# Allegro board AVRUSB500_0729.brd
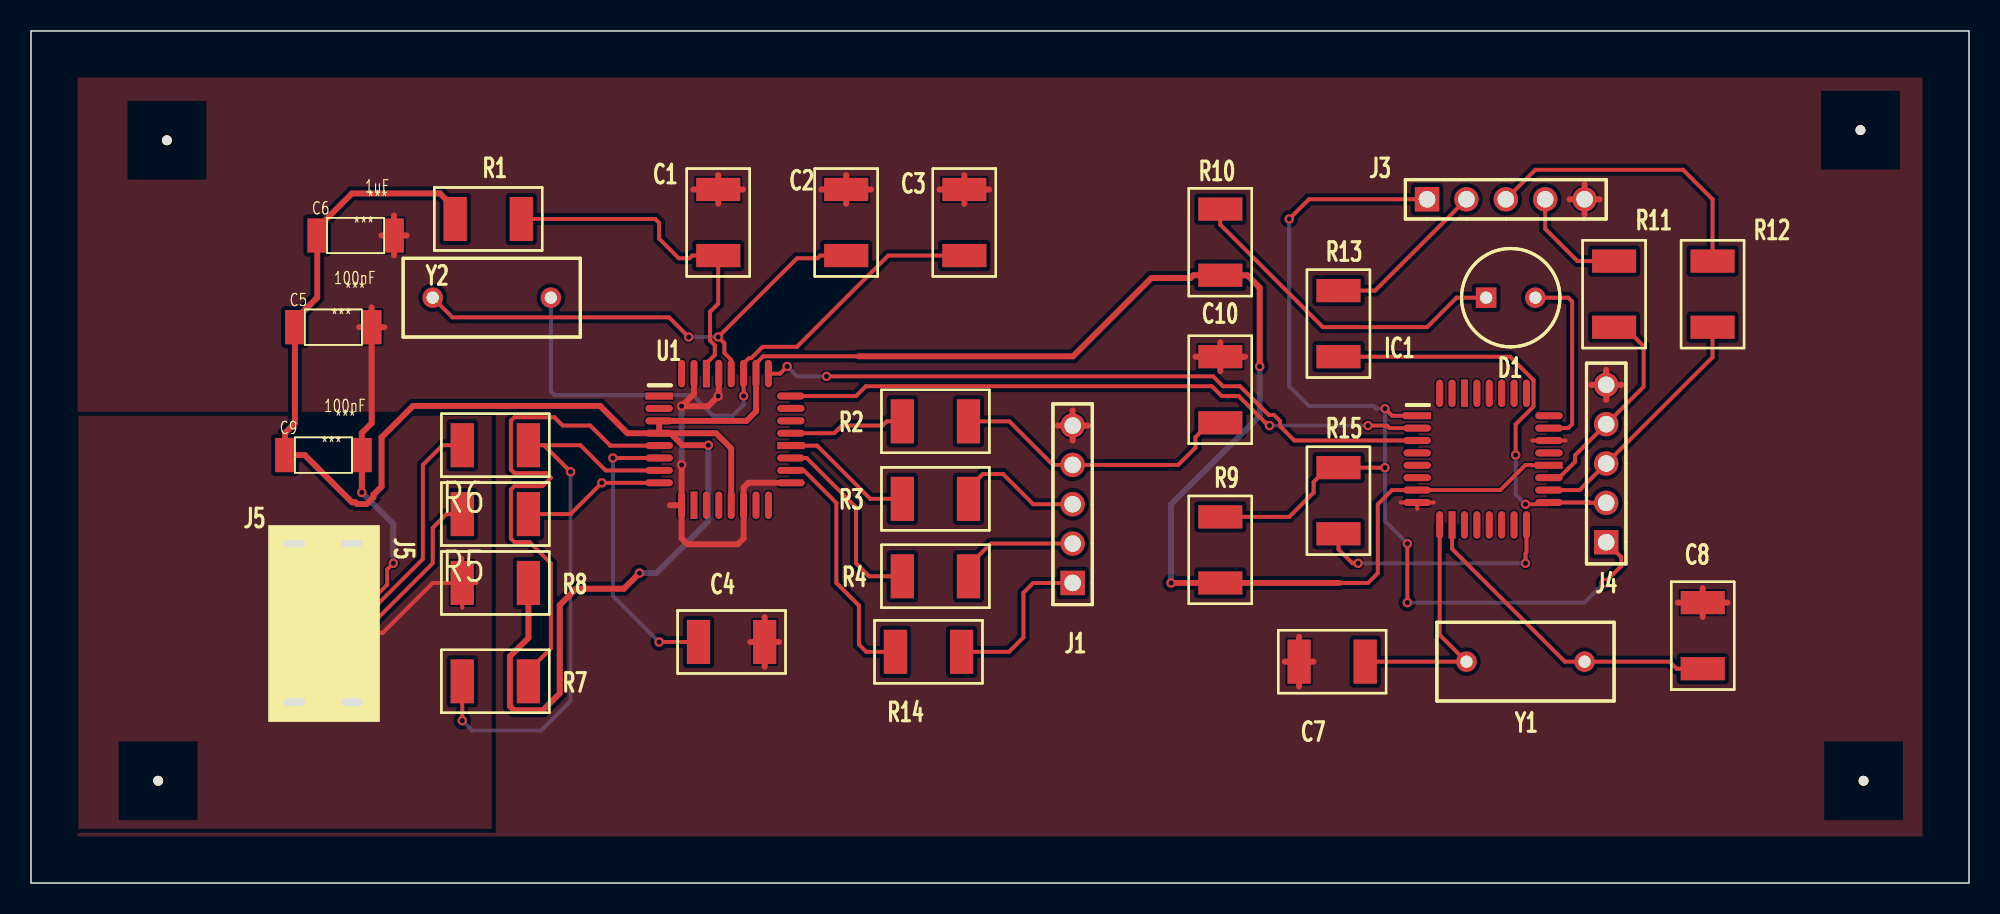
[diagram p0: board, top side]
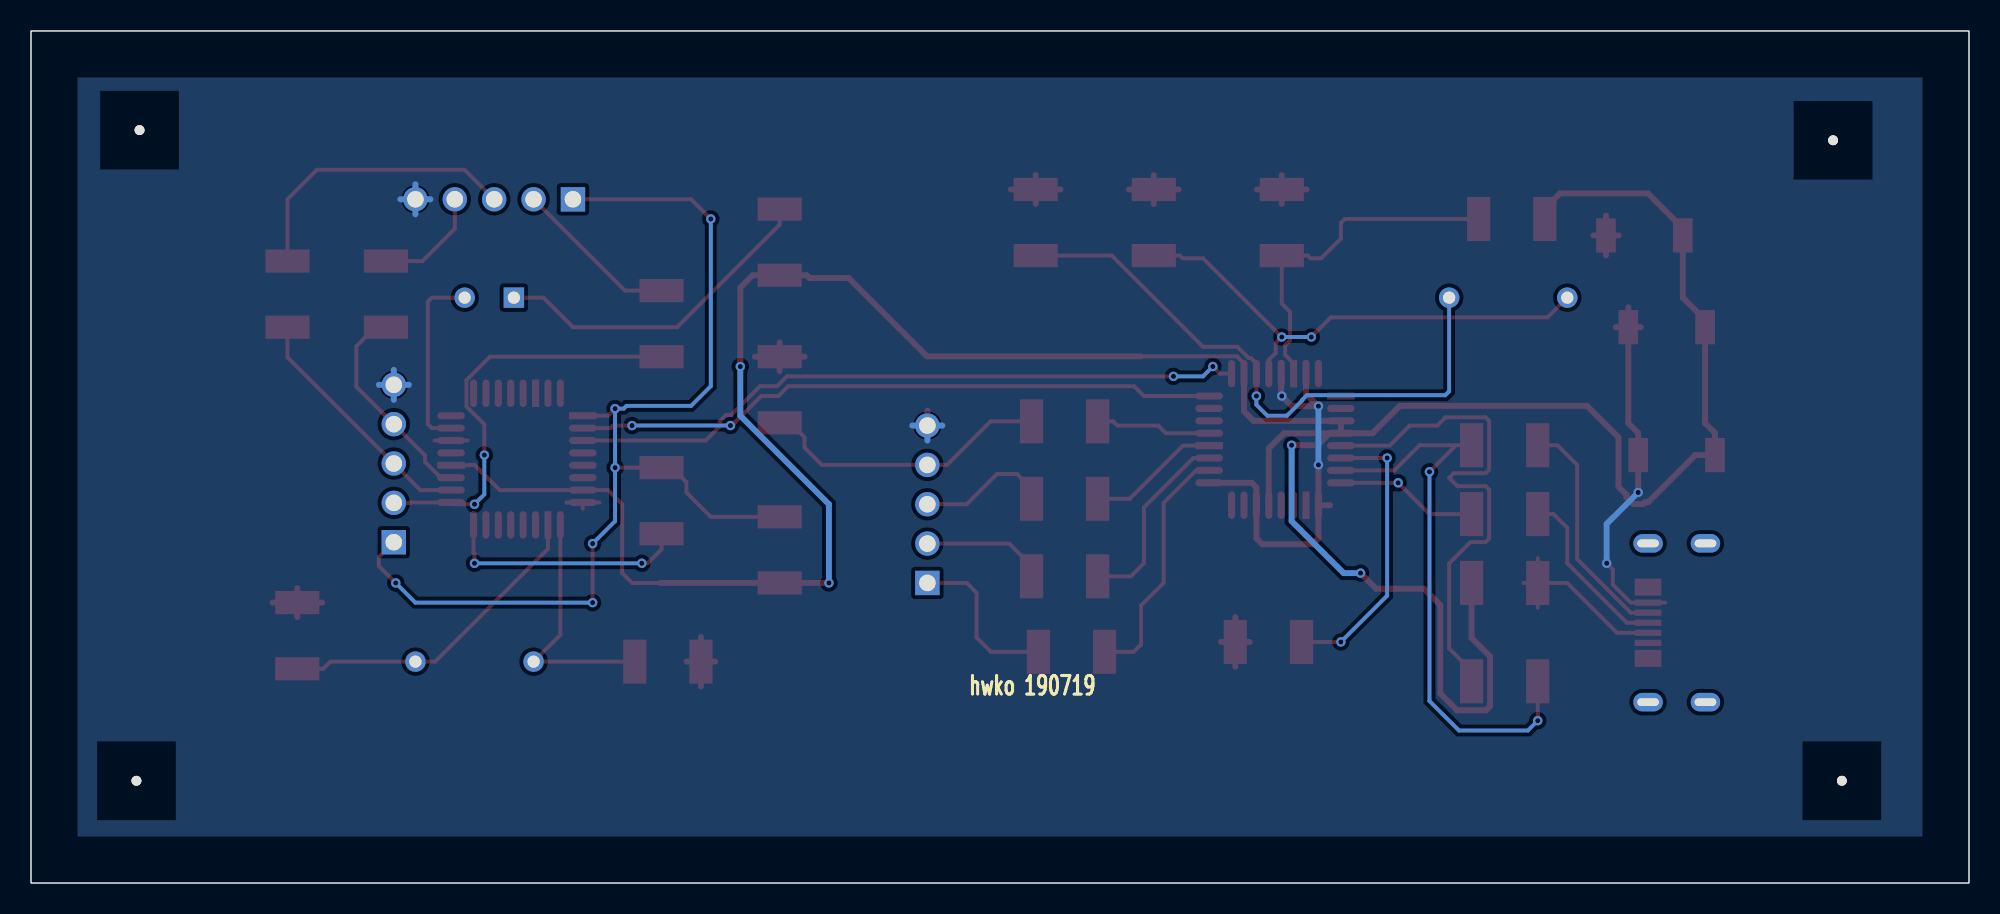
[diagram p1: board, bottom side, seen from below]

Outline 125 x 55 mm; copper layers: TOP, BOTTOM. Coordinates in mm from the lower left corner of the outline.
Outline path: rectangle 0,0 125,55

## Design rules (mm)
constraint set DEFAULT: min track width 0.254
net group POWERNETS: nets VCC

## Placement (name value [footprint] x y rotation side)
C1  47nF  [CPCYL1D225LS100031#2]  44.32 44.77 270 top
C2  27pF  [CPCYL1D225LS100031#2]  52.58 44.77 270 top
C3  27pF  [CPCYL1D225LS100031#2]  60.2 44.77 270 top
C4  47nF  [CPCYL1D225LS100031#2]  43.05 15.56 0 top
C5  100nF  [CPCYL1D225LS100031]  19.56 35.88 0 top
C6  1uF  [CPCYL1D225LS100031]  21 41.8 0 top
C7  100nF  [CPCYL1D225LS100031#2]  81.79 14.29 0 top
C8  100nF  [CPCYL1D225LS100031#2]  107.83 18.1 270 top
C9  100nF  [CPCYL1D225LS100031]  18.93 27.62 0 top
C10  22nF  [CPCYL1D225LS100031#2]  76.71 33.98 270 top
D1  LED  [CYLD250LS125031]  93.86 37.78 0 top
IC1  ATmega8  [QUAD80M32WG900]  89.41 30.16 270 top
J1  bbpg_Bitbang  [BLKCON100VHTM1SQSW1005]  67.19 19.37 90 top
J3  avrusb500_out  [BLKCON100VHTM1SQSW1005]  90.05 44.13 0 top
J4  firmware_in  [BLKCON100VHTM1SQSW1005]  101.6 22 90 top
J5  USBA  [MICRO_USB]  17 16.8 270 top
NOREF  -  []  125 0 90 top
NOREF#2  -  []  0 55 0 top
NOREF#3  -  [unnamed#2]  8.2 6.6 0 top
NOREF#4  -  [unnamed#2]  118 48.6 0 top
NOREF#5  -  [unnamed#2]  118.2 6.6 0 top
NOREF#6  -  [unnamed#2]  8.77 47.95 0 top
R1  470  [AX400X100031]  31.62 42.87 180 top
R2  220  [AX400X100031]  56.2 29.8 0 top
R3  220  [AX400X100031]  56.2 24.8 0 top
R4  220  [AX400X100031]  56.2 19.8 0 top
R5  27  [AX400X100031]  27.81 23.81 0 top
R6  27  [AX400X100031]  27.81 28.26 0 top
R7  1.5k  [AX400X100031]  27.81 13.02 0 top
R8  2.2  [AX400X100031]  27.81 19.37 0 top
R9  10k  [AX400X100031]  76.71 19.37 90 top
R10  470  [AX400X100031]  76.71 43.5 270 top
R11  1k  [AX400X100031]  102.11 35.88 90 top
R12  220  [AX400X100031]  108.46 35.88 90 top
R13  1k  [AX400X100031]  84.33 33.98 90 top
R14  220  [AX400X100031]  55.75 14.93 0 top
R15  220  [AX400X100031]  84.33 22.55 90 top
U1  FT232BM  [QUAD80M32WG900]  40.52 31.44 270 top
Y1  3.6864Mhz  [RAD450X200LS300031]  100.21 14.29 180 top
Y2  6Mhz  [RAD450X200LS300031]  25.91 37.78 0 top

## Library data of the parts
C1-C4 C7 C8 C10 = CAPACITOR NON-POL: alternate symbols: (SML2015)
C5 C9 = CAPACITOR NON-POL: Tolerance: ***; User Part Number: ***; alternate symbols: (SMDCAP)
C6 = CAPACITOR POL: Tolerance: ***; User Part Number: ***; alternate symbols: (SMDCAP)
D1 = LED
IC1 = ATmega8-DIL28_1
J1 J3 J4 = CON5
J5 = CON4_7
R1-R15 = R: alternate symbols: (SML2015)
U1 = FT232BM_2
Y1 Y2 = ZTA

## Footprints (pads in the part's own frame, mm; a bottom-side part is the same pattern mirrored in y, then rotated)
AX400X100031
  rect 1.499x2.845 smd: 1(0,0) 2(4.267,0)
BLKCON100VHTM1SQSW1005
  rect 1.575x1.575 hole 1.067: 1(0,0)
  round 1.575 hole 1.067: 2(2.54,0) 3(5.08,0) 4(7.62,0) 5(10.16,0)
CPCYL1D225LS100031
  rect 1.27x2.21 smd: 1(-2.54,0) 2(2.413,0)
CPCYL1D225LS100031#2
  rect 1.499x2.845 smd: 1(0,0) 2(4.267,0)
CYLD250LS125031
  rect 1.321x1.321 hole 0.787: 1(0,0)
  round 1.321 hole 0.787: 2(3.175,0)
MICRO_USB
  oval 1.2x1.9 hole 0.5x1.4: (-5.125,3.7) (-5.125,0) (5.125,3.7) (5.125,0)
  rect 1.1x1.72 smd: (-2.3,3.7) (2.3,3.7)
  rect 0.4x1.72 smd: 1(-1.3,3.7) 2(-0.65,3.7) 3(0,3.7) 4(0.65,3.7) 5(1.3,3.7)
QUAD80M32WG900
  rect 0.457x1.778 smd: 1(0,0) 20(3.2,8.496)
  oval 0.457x1.778 smd: 2(0.8,0) 3(1.6,0) 4(2.4,0) 5(3.2,0) 6(4,0) 7(4.801,0) 8(5.601,0) 17(5.601,8.496) 18(4.801,8.496) 19(4,8.496) 21(2.4,8.496) 22(1.6,8.496) 23(0.8,8.496) 24(0,8.496)
  oval 1.778x0.457 smd: 9(7.048,1.448) 11(7.048,3.048) 12(7.048,3.848) 13(7.048,4.648) 14(7.048,5.448) 15(7.048,6.248) 16(7.048,7.048) 25(-1.448,7.048) 26(-1.448,6.248) 27(-1.448,5.448) 28(-1.448,4.648) 29(-1.448,3.848) 31(-1.448,2.248) 32(-1.448,1.448)
  rect 1.778x0.457 smd: 10(7.048,2.248) 30(-1.448,3.048)
RAD450X200LS300031
  round 1.321 hole 0.787: 1(0,0) 2(7.62,0)
unnamed#2
  round 0.635 hole 3.175 unplated: (0,0)

## Nets
+5V: J5.4 R8.1
GND: C1.1 C2.1 C3.1 C4.2 C5.2 C6.2 C7.1 C8.1 C9.2 C10.1 IC1.8 IC1.22 J1.5 J3.5 J4.5 J5.1 U1.9 U1.14 U1.17 U1.29 U1.31
VCC: C5.1 C6.1 C9.1 IC1.7(VCC) IC1.20 R1.2 R8.2 R9.1 R10.2 U1.3 U1.4 U1.13 U1.26
BMISO: J1.3 R3.2
BMOSI: J1.2 R4.2
BRESET: J1.1 R14.2
BSCK: C10.2 J1.4 R2.2
D+: J5.2 R6.1
D-: J5.3 R5.1
F_MISO: IC1.18 J4.3 R12.1
F_MOSI: IC1.17 J4.2 R13.1
F_SCK: IC1.19 J4.4 R11.1
MISO: J3.3 R12.2
MOSI: J3.2 R13.2
RESET: IC1.1 J3.1 J4.1 R9.2 R15.2
RXD: IC1.2 U1.24
SCK: J3.4 R11.2
TXD: IC1.3 U1.25
N02483: R6.2 R7.1 U1.7
N02615: R5.2 U1.8
N03527: C4.1 U1.6
N06839: R2.1 U1.21
N06967: R3.1 U1.20
N07033: R4.1 U1.19
N07247: R14.1 U1.18
N11951: R7.2 U1.5
N15182: C7.2 IC1.9 Y1.2
N15289: C8.2 IC1.10 Y1.1
N19734: D1.2(CATHODE) IC1.23
N20572: D1.1 R10.1
N22544: IC1.16 R15.1
N41098: C3.2 U1.27 Y2.2
N41106: C2.2 U1.28(XTOUT) Y2.1
N49165: C1.2 R1.1 U1.30

Pads without a net: IC1 4 5 6 11 12 13 14 15 21 24 25 26 27 28 29 30 31 32; J5 5; U1 1 2 10 11 12 15 16 22 23 32

## Via types
v1: diameter 0.61, hole 0.33, TOP to BOTTOM, 31 vias

## Routing (per net, layer and track width the routed paths; a pad name or vN(x,y) marks a point on that pad's centre or on a via; arc(x,y) is an arc through that point)
+5V: length 12.6
  TOP w0.254: J5.4 22.69,16.15 25.91,19.37 R8.1 ; R8.1 27.81,17.77 ; R8.1 27.81,20.97 ; R8.1 28.74,19.37
GND: length 117.7
  TOP w0.254: 96.84,28.56 IC1.22 98.97,28.56 ; 88.34,24.56 IC1.8 ; IC1.8 89.41,24.16 ; IC1.8 90.48,24.56 ; v1(23.37,20.64) 22.97,20.24 22.97,19.26 21.81,18.1 J5.1 19.59,18.1
  TOP w0.381: C2.1 54.18,44.77 ; C2.1 50.98,44.77 ; C2.1 52.58,45.7 ; C2.1 52.58,43.84 ; C7.1 81.79,15.89 ; C7.1 81.79,12.69 ; C7.1 80.86,14.29 ; C7.1 82.72,14.29 ; C10.1 76.71,34.9 ; C10.1 78.31,33.98 ; C10.1 75.11,33.98 ; C10.1 76.71,33.05 ; C8.1 109.43,18.1 ; C8.1 106.22,18.1 ; C8.1 107.83,19.03 ; C8.1 107.83,17.17 ; 22.6,41.8 C6.2 ; C6.2 24.23,41.8 ; C6.2 23.41,40.52 ; C6.2 23.41,43.08 ; 44.32,43.84 C1.1 ; C1.1 44.32,45.7 ; C1.1 42.72,44.77 ; C1.1 45.93,44.77 ; 100.21,43.17 J3.5 ; J3.5 100.21,45.1 ; J3.5 101.17,44.13 ; J3.5 99.24,44.13 ; C5.2 21.97,29.68 21.34,29.05 C9.2 v1(21.34,25.21) ; C5.2 22.79,35.88 ; C5.2 21.16,35.88 ; C5.2 21.97,37.16 ; J4.5 101.6,33.13 ; J4.5 101.6,31.19 ; J4.5 102.57,32.16 ; J4.5 100.63,32.16 ; 60.2,43.84 C3.1 ; C3.1 58.6,44.77 ; C3.1 61.8,44.77 ; C3.1 60.2,45.7 ; 46.39,15.56 C4.2 ; C4.2 48.25,15.56 ; C4.2 47.32,17.16 ; C4.2 47.32,13.96 ; J1.5 68.15,29.53 ; J1.5 66.22,29.53 ; J1.5 67.19,30.5 ; J1.5 67.19,28.56
  TOP w0.382: 41.96,24.39 41.96,22.25 42.34,21.87 45.58,21.87 45.96,22.25 U1.14 45.96,25.53 46.27,25.83 U1.17 ; 41.96,24.39 v1(41.96,26.99) ; 41.96,24.39 41.21,24.39 ; U1.31 42.76,31.58 v1(41.96,30.78) 43.67,30.78 v1(44.32,31.44) 44.36,31.47 U1.29
  BOTTOM w0.381: 99.24,44.13 J3.5 ; J3.5 101.17,44.13 ; J3.5 100.21,45.1 ; J3.5 100.21,43.17 ; J4.5 101.6,33.13 ; J4.5 102.57,32.16 ; J4.5 101.6,31.19 ; J4.5 100.63,32.16 ; J1.5 68.15,29.53 ; J1.5 67.19,28.56 ; J1.5 66.22,29.53 ; v1(21.34,25.21) 23.37,23.18 v1(23.37,20.64)
  BOTTOM w0.382: v1(41.96,26.99) v1(41.96,30.78)
VCC: length 200.5
  TOP w0.254: 53.4,34 47.22,34 46.76,33.54 U1.26 ; IC1.20 96.76,26.97 96.74,26.99 96.4,26.99 94.77,25.36 IC1.7 87.78,25.36 86.87,24.45 86.87,20.01 86.23,19.37 84.4,19.37
  TOP w0.381: R8.2 32.08,15.82 30.89,14.63 30.89,11.41 31.15,11.15 33.02,11.15 34.1,12.24 34.1,17.94 35.16,19 ; 84.4,19.37 R9.1 v1(73.54,19.37) ; v1(79.25,33.34) 79.25,38.43 78.45,39.23 R10.2 74.97,39.23 74.79,39.05 72.27,39.05 67.21,34 53.4,34 ; C9.1 16.39,29.05 17.02,29.68 C5.1 17.02,36.35 18.46,37.79 C6.1 18.46,42.27 20.7,44.51 26.38,44.51 27.36,43.54 R1.2
  TOP w0.382: U1.4 41.24,29.04 ; U1.4 U1.3 46.15,29.84 46.76,30.45 U1.26 ; U1.4 38.47,29.04 36.7,30.8 24.64,30.8 22.61,28.77 22.61,25.58 22.09,25.06 22.09,24.9 21.65,24.46 21.03,24.46 20.91,24.58 20.7,24.58 17.66,27.62 C9.1 ; 41.24,29.04 44.18,29.04 45.16,28.06 U1.13 ; 41.24,29.04 42.01,28.26 v1(43.69,28.26) ; v1(39.24,20.01) 38.24,19 35.16,19
  BOTTOM w0.381: v1(79.25,33.34) 79.25,30.16 73.54,24.45 v1(73.54,19.37)
  BOTTOM w0.382: v1(43.69,28.26) 43.69,23.36 40.33,20.01 v1(39.24,20.01)
BMISO: length 8.6
  TOP w0.254: R3.2 60.47,25.47 61.4,26.4 62.69,26.4 64.64,24.45 J1.3
BMOSI: length 8
  TOP w0.254: R4.2 60.47,20.47 61.9,21.91 J1.2
BRESET: length 10.7
  TOP w0.254: R14.2 63.09,14.93 64.01,15.85 64.01,18.73 64.64,19.37 J1.1
BSCK: length 18.9
  TOP w0.254: R2.2 63.1,29.8 65.92,26.99 J1.4 73.99,26.99 75.11,28.11 75.11,28.78 76.04,29.71 C10.2
D+: length 15.2
  TOP w0.254: R6.1 26.55,28.26 25.27,26.99 25.27,20.91 21.81,17.45 J5.2
D-: length 11.4
  TOP w0.254: R5.1 26.8,23.81 25.91,22.93 25.91,20.64 22.07,16.8 J5.3
F_MISO: length 16
  TOP w0.254: IC1.18 99.88,25.36 J4.3 108.46,33.94 R12.1
F_MOSI: length 27.2
  TOP w0.254: R13.1 95.4,33.98 96.91,32.46 96.91,30.76 95.76,29.61 v1(95.76,27.62) ; v1(96.4,24.45) 97.79,24.45 IC1.17 100.53,24.56 100.56,24.54 J4.2
  BOTTOM w0.254: v1(96.4,24.45) 95.76,25.09 v1(95.76,27.62)
F_SCK: length 13.8
  TOP w0.254: R11.1 102.78,35.88 104.02,34.65 104.02,32.04 J4.4 99.59,27.61 99.59,27.19 98.57,26.16 IC1.19
MISO: length 18.9
  TOP w0.254: R12.2 108.46,44.13 106.56,46.04 97.03,46.04 J3.3
MOSI: length 10.7
  TOP w0.254: R13.2 86.69,38.24 J3.2
RESET: length 71.4
  TOP w0.254: v1(87.33,26.81) R15.2 83.66,26.81 82.73,25.88 82.73,25.21 81.16,23.64 R9.2 ; IC1.1 87.78,30.16 v1(87.33,30.62) ; v1(81.16,42.87) 82.43,44.13 J3.1 ; v1(101.48,19.37) 102.57,20.46 102.57,21.03 J4.1 ; v1(88.78,21.91) v1(88.78,18.1)
  BOTTOM w0.254: v1(88.78,21.91) 87.33,23.36 v1(87.33,26.81) v1(87.33,30.62) 86.77,30.62 86.59,30.8 82.43,30.8 81.16,32.07 v1(81.16,42.87) ; v1(88.78,18.1) 100.21,18.1 v1(101.48,19.37)
RXD: length 41.8
  TOP w0.254: U1.24 53.21,31.44 53.85,32.07 76.16,32.07 76.8,31.44 77.9,31.44 79.62,29.71 79.71,29.71 v1(79.89,29.53) ; v1(86.23,29.53) 87.47,29.53 87.63,29.37 IC1.2
  BOTTOM w0.254: v1(79.89,29.53) v1(86.23,29.53)
SCK: length 7.2
  TOP w0.254: J3.4 97.67,42.23 99.75,40.15 R11.2
TXD: length 44.2
  TOP w0.254: v1(48.77,33.34) 48.31,32.88 U1.25 ; v1(51.31,32.7) 76.24,32.7 76.88,32.07 77.98,32.07 79.83,30.22 80.17,30.22 80.57,29.81 80.57,29.48 81.48,28.56 IC1.3
  BOTTOM w0.254: v1(48.77,33.34) 49.41,32.7 v1(51.31,32.7)
N02483: length 36.9
  TOP w0.254: R6.2 33.09,28.26 ; 33.09,28.26 35.44,28.26 37.06,26.63 U1.7 ; 33.09,28.26 v1(34.8,26.55) ; v1(27.81,10.48) R7.1
  BOTTOM w0.254: v1(27.81,10.48) 28.45,9.85 32.9,9.85 34.8,11.75 v1(34.8,26.55)
N02615: length 9.3
  TOP w0.254: U1.8 v1(36.82,25.83) 34.8,23.81 R5.2
N03527: length 18.6
  TOP w0.254: U1.6 v1(37.53,27.44) ; v1(40.52,15.56) C4.1
  BOTTOM w0.254: v1(37.53,27.44) 37.53,18.55 v1(40.52,15.56)
N06839: length 7.5
  TOP w0.254: R2.1 55.2,29.8 54.93,29.53 52.3,29.53 51.81,29.04 U1.21
N06967: length 8.6
  TOP w0.254: U1.20 50.7,28.23 54.13,24.8 R3.1
N07033: length 12.5
  TOP w0.254: U1.19 50.03,27.44 53.21,24.25 53.21,20.64 54.05,19.8 R4.1
N07247: length 16.1
  TOP w0.254: R14.1 53.88,14.93 53.4,15.4 53.4,17.91 51.95,19.37 51.95,24.54 49.85,26.63 U1.18
N11951: length 33.9
  TOP w0.254: R7.2 32.08,13.69 33.53,15.14 33.53,20.63 32.15,22.01 31.17,22.01 30.95,22.23 30.95,25.4 31.17,25.62 32.99,25.62 33.53,26.16 33.23,26.46 31.17,26.46 30.95,26.68 30.95,29.84 31.17,30.06 33.76,30.06 34.29,29.53 36.07,29.53 37.37,28.23 U1.5
N15182: length 16.1
  TOP w0.254: C7.2 Y1.2 90.86,16.02 IC1.9
N15289: length 20.9
  TOP w0.254: IC1.10 91.66,21.57 98.94,14.29 Y1.1 105.69,14.29 106.15,13.83 C8.2
N19734: length 12
  TOP w0.254: IC1.23 99.15,29.37 99.41,29.62 99.41,37.53 99.15,37.78 D1.2
N20572: length 21.7
  TOP w0.254: D1.1 91.95,37.78 90.05,35.88 83.33,35.88 76.71,42.5 R10.1
N22544: length 15.9
  TOP w0.254: v1(96.4,20.64) 96.4,21.28 96.46,21.34 IC1.16 ; v1(85.6,20.64) 85.23,20.64 84.33,21.54 R15.1
  BOTTOM w0.254: v1(85.6,20.64) v1(96.4,20.64)
N41098: length 39.2
  TOP w0.254: C3.2 55.29,40.5 49.4,34.61 47.19,34.61 46.46,33.88 46.3,33.88 45.96,33.54 U1.27 v1(45.96,31.44)
  BOTTOM w0.254: Y2.2 33.53,31.74 33.78,31.49 42.7,31.49 43,31.19 43,31.15 43.99,30.16 45.25,30.16 45.96,30.88 v1(45.96,31.44)
N41106: length 32.6
  TOP w0.254: U1.28 45.16,33.77 44.72,34.21 44.72,34.85 v1(44.32,35.24) 49.41,40.32 50.73,40.32 50.9,40.5 C2.2 ; Y2.1 27.18,36.52 41.15,36.52 v1(42.42,35.24)
  BOTTOM w0.254: v1(42.42,35.24) v1(44.32,35.24)
N49165: length 22.6
  TOP w0.254: U1.30 43.56,33.54 44.1,34.09 44.1,34.71 43.79,35.02 43.79,36.87 44.32,37.4 C1.2 42.65,40.5 42.47,40.32 41.78,40.32 40.52,41.59 40.52,42.61 40.26,42.87 R1.1

## Copper pours and planes (outline as drawn; the poured copper is in the pictures)
+5V on TOP: 3.05,3.5 3.05,30.16 29.72,30.16 29.72,3.5 ; 2 cut-outs
GND on TOP: 3,3 3,52 122,52 122,3 ; 9 cut-outs
GND on BOTTOM: 3,3 3,52 122,52 122,3

## Text on the board
Ref Des/Silkscreen Bottom: hwko 190719
DIMENSION: FIGURE | FINISHED_SIZE | 0.33 | 0.7869 | 1.0671 | 3.175 | 1.4x0.5001 | DRILL CHART: TOP to BOTTOM | ALL UNITS ARE IN MILLIMETERS | PLATED | NON-PLATED | QTY | 29 | 10 | 15 | 4
